# EAGLE board Bedroom_board (EAGLE 7.7.0)
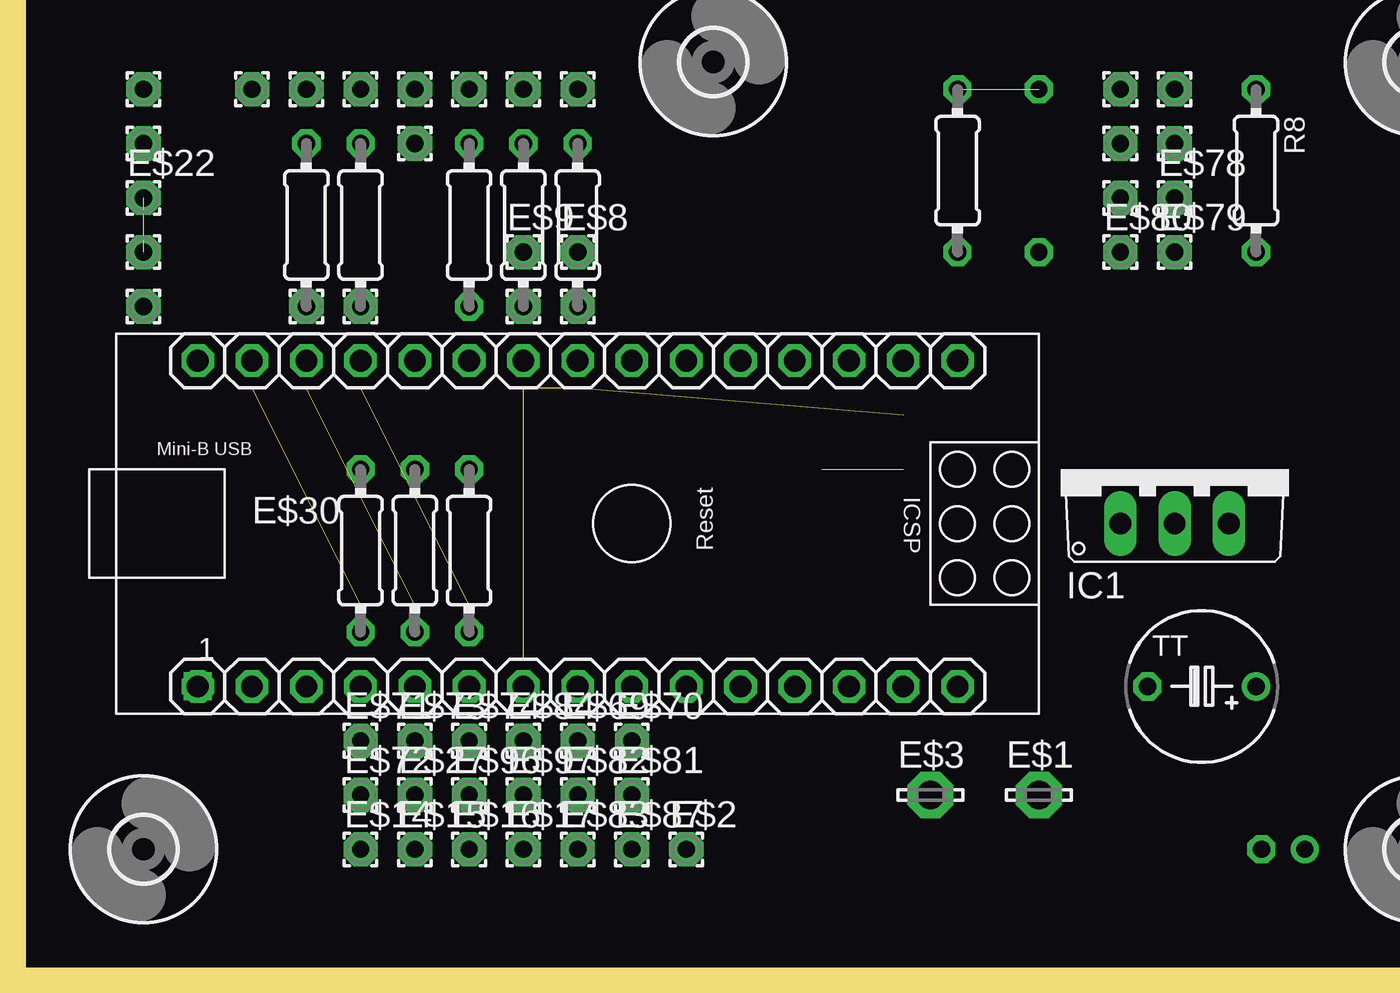
[diagram p0: board, top side]
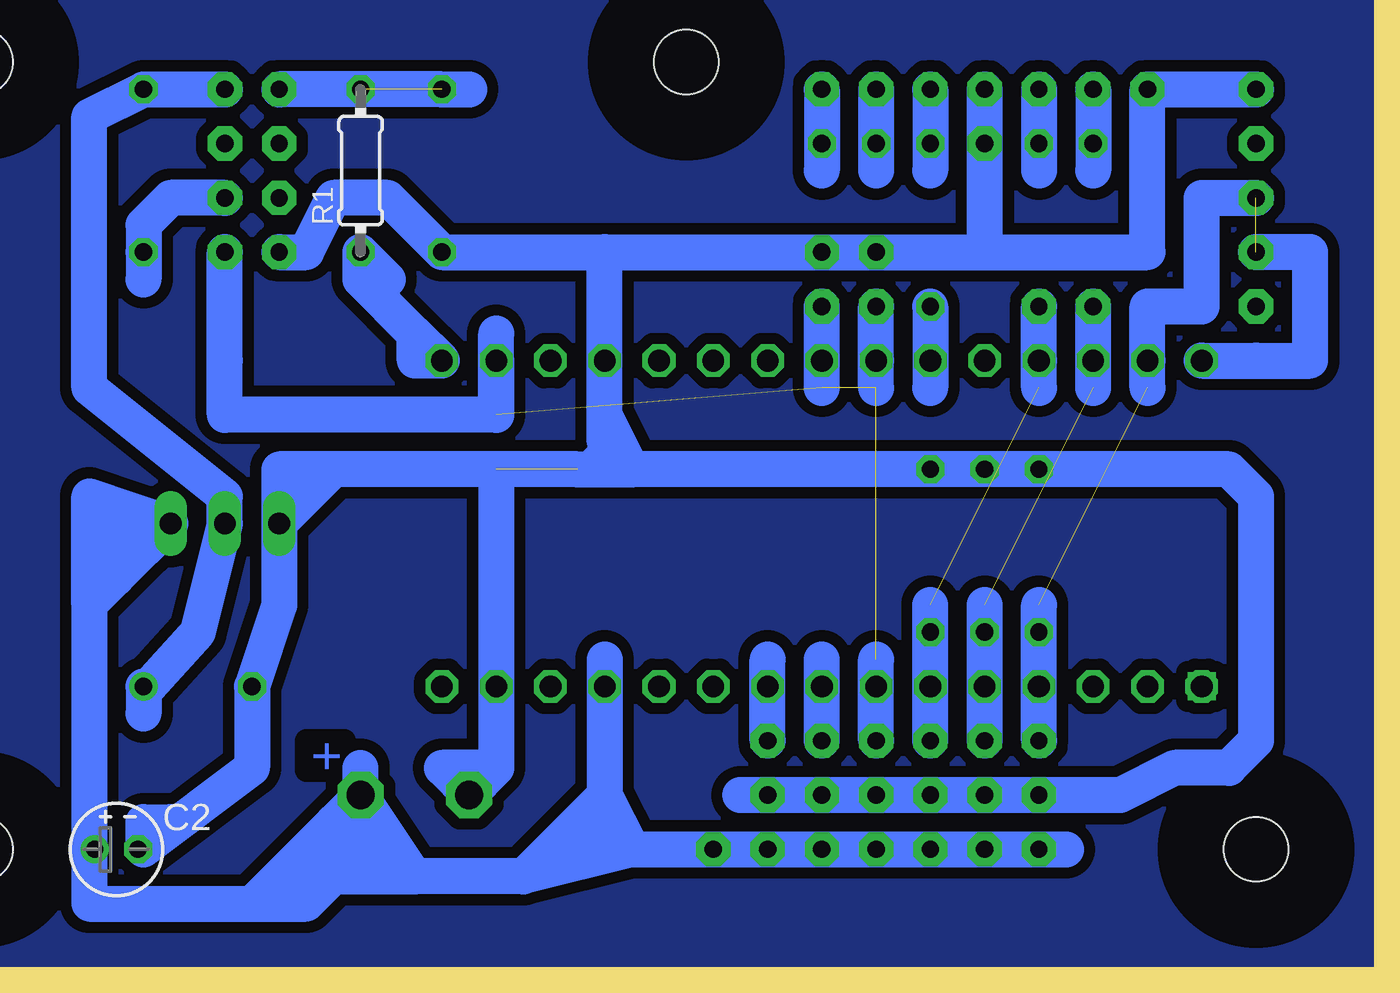
[diagram p1: board, bottom side, seen from below]

No outline drawn. Coordinates in mm, seen from the top.
Copper layers (1*16): Top 0.035mm / dielectric 1.5mm / Bottom 0.035mm
Design rules "ESP test": minimum track width 10mil, minimum drill 24mil, track to track 0.205mm, track to pad 0.205mm, pad to pad 0.205mm, via to via 0.205mm, smd to smd 8mil, copper to edge 40mil, drill to drill 8mil, minimum pad ring 10mil, minimum via ring 8mil, stop-mask expansion 4mil, vias tented up to drill 0mil, thermal gap 10mil
Net classes: 0 default: clearance 0.205 mm
Milling: 4 lines

## Footprints (pad centres in the part's own frame; a part is rotated, then mirrored left to right if it is on the bottom)
E2-4 = drill 0.813 pad 1.27: + -1.016,0 | drill 0.813 pad 1.27 octagon: - 1.016,0
LSP13 = drill 1.321 pad 2.159 octagon: MP 0,0
1,6/0,8 = drill 0.813 pad 1.6 octagon: 1 0,0
3,0 = hole 3: 0,0
ARDUINO_NANO = drill 0.8 square: 1 -20.32,-7.62 | drill 0.8: 2 -17.78,-7.62; 3 -15.24,-7.62; 4 -12.7,-7.62; 5 -10.16,-7.62; 6 -7.62,-7.62; 7 -5.08,-7.62; 8 -2.54,-7.62; 9 0,-7.62; 10 2.54,-7.62; 11 5.08,-7.62; 12 7.62,-7.62; 13 10.16,-7.62; 14 12.7,-7.62; 15 15.24,-7.62; 16 15.24,7.62; 17 12.7,7.62; 18 10.16,7.62; 19 7.62,7.62; 20 5.08,7.62; 21 2.54,7.62; 22 0,7.62; 23 -2.54,7.62; 24 -5.08,7.62; 25 -7.62,7.62; 26 -10.16,7.62; 27 -12.7,7.62; 28 -15.24,7.62; 29 -17.78,7.62; 30 -20.32,7.62
1X01 = drill 1.016 octagon: 1 0,0
TAP5-70 = drill 0.813: + -2.54,0 | drill 0.813 octagon: - 2.54,0
TO220V = drill 1.016 long: 1 -2.54,-2.54; 2 0,-2.54; 3 2.54,-2.54
0204/7 = drill 0.813 octagon: 1 -3.81,0; 2 3.81,0

## Placement (x,y rotation side)
C2  100uF  [E2-4]  57.15,5.08 0 bottom
E$1  [LSP13]  45.72,7.62 0 top
E$2  [1,6/0,8]  29.21,5.08 0 top
E$3  [LSP13]  40.64,7.62 0 top
E$4  [3,0]  30.48,41.91 0 top
E$5  [3,0]  63.5,41.91 0 top
E$6  [3,0]  63.5,5.08 0 top
E$7  [3,0]  3.81,5.08 0 top
E$8  [1,6/0,8]  24.13,33.02 0 top
E$9  [1,6/0,8]  21.59,33.02 0 top
E$10  [1,6/0,8]  3.81,35.56 0 top
E$11  [1,6/0,8]  3.81,38.1 0 top
E$12  [1,6/0,8]  3.81,40.64 0 top
E$14  [1,6/0,8]  13.97,5.08 0 top
E$15  [1,6/0,8]  16.51,5.08 0 top
E$16  [1,6/0,8]  19.05,5.08 0 top
E$17  [1,6/0,8]  21.59,5.08 0 top
E$18  [1,6/0,8]  11.43,40.64 0 top
E$19  [1,6/0,8]  8.89,40.64 0 top
E$20  [1,6/0,8]  13.97,40.64 0 top
E$21  [1,6/0,8]  3.81,30.48 0 top
E$22  [1,6/0,8]  3.81,35.56 0 top
E$23  [1,6/0,8]  11.43,30.48 0 top
E$24  [1,6/0,8]  13.97,30.48 0 top
E$25  [1,6/0,8]  19.05,40.64 0 top
E$26  [1,6/0,8]  16.51,40.64 0 top
E$27  [1,6/0,8]  16.51,7.62 0 top
E$28  [1,6/0,8]  16.51,38.1 0 top
E$30  [ARDUINO_NANO]  26.67,20.32 0 top
E$31  [1,6/0,8]  21.59,30.48 0 top
E$32  [1,6/0,8]  24.13,30.48 0 top
E$33  [1X01]  6.35,12.7 0 top
E$34  [1X01]  8.89,12.7 0 top
E$35  [1X01]  11.43,12.7 0 top
E$36  [1X01]  13.97,12.7 0 top
E$37  [1X01]  16.51,12.7 0 top
E$38  [1X01]  19.05,12.7 0 top
E$39  [1X01]  21.59,12.7 0 top
E$40  [1X01]  24.13,12.7 0 top
E$41  [1X01]  26.67,12.7 0 top
E$42  [1X01]  29.21,12.7 0 top
E$43  [1X01]  31.75,12.7 0 top
E$44  [1X01]  34.29,12.7 0 top
E$45  [1X01]  36.83,12.7 0 top
E$46  [1X01]  39.37,12.7 0 top
E$47  [1X01]  41.91,12.7 0 top
E$48  [1X01]  41.91,27.94 0 top
E$49  [1X01]  39.37,27.94 0 top
E$50  [1X01]  36.83,27.94 0 top
E$51  [1X01]  34.29,27.94 0 top
E$52  [1X01]  31.75,27.94 0 top
E$53  [1X01]  29.21,27.94 0 top
E$54  [1X01]  26.67,27.94 0 top
E$55  [1X01]  24.13,27.94 0 top
E$56  [1X01]  21.59,27.94 0 top
E$57  [1X01]  19.05,27.94 0 top
E$58  [1X01]  16.51,27.94 0 top
E$59  [1X01]  13.97,27.94 0 top
E$60  [1X01]  11.43,27.94 0 top
E$67  [1X01]  6.35,27.94 0 top
E$68  [1X01]  8.89,27.94 0 top
E$69  [1,6/0,8]  24.13,10.16 0 top
E$70  [1,6/0,8]  26.67,10.16 0 top
E$71  [1,6/0,8]  13.97,10.16 0 top
E$72  [1,6/0,8]  13.97,7.62 0 top
E$73  [1,6/0,8]  16.51,10.16 0 top
E$74  [1,6/0,8]  19.05,10.16 0 top
E$75  [1,6/0,8]  49.53,40.64 0 top
E$76  [1,6/0,8]  52.07,40.64 0 top
E$77  [1,6/0,8]  52.07,38.1 0 top
E$78  [1,6/0,8]  52.07,35.56 0 top
E$79  [1,6/0,8]  52.07,33.02 0 top
E$80  [1,6/0,8]  49.53,33.02 0 top
E$81  [1,6/0,8]  26.67,7.62 0 top
E$82  [1,6/0,8]  24.13,7.62 0 top
E$83  [1,6/0,8]  24.13,5.08 0 top
E$84  [1,6/0,8]  21.59,10.16 0 top
E$85  [1,6/0,8]  49.53,35.56 0 top
E$86  [1,6/0,8]  49.53,38.1 0 top
E$87  [1,6/0,8]  26.67,5.08 0 top
E$90  1000uF  [TAP5-70]  53.34,12.7 180 top
E$96  [1,6/0,8]  19.05,7.62 0 top
E$97  [1,6/0,8]  21.59,7.62 0 top
E$103  [1,6/0,8]  3.81,33.02 0 top
E$108  [1,6/0,8]  24.13,40.64 0 top
E$109  [1,6/0,8]  21.59,40.64 0 top
IC1  LM1117T(V)-ADJ  [TO220V]  52.07,22.86 0 top
R1  1K  [0204/7]  45.72,36.83 90 bottom
R2  2K  [0204/7]  41.91,36.83 270 top
R3  100  [0204/7]  11.43,34.29 270 top
R4  10k  [0204/7]  13.97,19.05 270 top
R5  10k  [0204/7]  16.51,19.05 270 top
R6  10k  [0204/7]  19.05,19.05 270 top
R7  220  [0204/7]  13.97,34.29 270 top
R8  10K  [0204/7]  55.88,36.83 270 top
R9  200  [0204/7]  21.59,34.29 270 top
R10  200  [0204/7]  24.13,34.29 270 top
R11  330  [0204/7]  19.05,34.29 270 top

## Library data of the parts
C2 E$90 R1-R11 = resistor
E$1 E$3 = solpad
E$2 E$8-E$12 E$14-E$28 E$31 E$32 E$69-E$87 E$96 E$97 E$103 E$108 E$109 = wirepad
E$4-E$7 = holes
E$30 = ArduinoNanoV30
E$33-E$60 E$67 E$68 = pinhead
IC1 = lm1117_11; MF: Texas Instruments; MPN: LM1777T-ADJ; OC_FARNELL: 9485805; OC_NEWARK: 13B5345

## Nets
GND: E$46.1 IC1.1 R2.2
N$3: IC1.2 R8.1
N$6: R1.1
N$7: R1.2 R2.1
N$11: R8.2
N$24: E$22.1 E$103.1
S$2: E$109.1
S$5: E$90.+
S$6: E$18.1
S$7: E$20.1
S$12: E$108.1
S$16: E$69.1
S$17: E$68.1
S$18: E$67.1
S$19: E$70.1
S$20: R11.2
VCC: IC1.3

## Tracks (layer width: path | path; a pad name or v marks a point on that pad's centre or on a via)
GND  (1 unrouted)
  Bottom 0.406: 11.43,7.62 21.59,7.62
  Bottom 0.813: 34.29,22.86 33.02,22.86 34.29,24.13 | 34.29,22.86 35.56,22.86 34.29,24.13 | 34.29,22.86 34.29,24.13
  Bottom 1.676: 33.02,22.86 5.08,22.86 3.81,21.59 3.81,10.16 5.08,8.89 7.62,8.89 10.16,7.62 21.59,7.62 27.94,7.62 | 33.02,22.86 35.56,22.86 46.99,22.86 | 46.99,22.86 IC1.1 | 34.29,33.02 16.51,33.02 | 16.51,33.02 8.89,33.02 8.89,40.64 3.81,40.64 | 34.29,33.02 R2.2 44.45,35.56 46.99,35.56 48.26,33.02 49.53,33.02 | 34.29,24.13 34.29,25.4 | 34.29,25.4 34.29,33.02 | IC1.1 49.53,16.51 50.8,12.7 50.8,8.89 55.88,5.08 55.88,6.35 54.61,6.35 | 33.02,22.86 34.29,25.4 | 46.99,22.86 49.53,22.86 IC1.1 | 16.51,33.02 16.51,40.64 | 39.37,22.86 E$46.1 39.37,8.89 | 39.37,8.89 40.64,7.62 41.91,8.89 39.37,8.89
N$3
  Bottom 1.676: 52.07,40.64 R8.1 58.42,39.37 58.42,26.67 52.07,21.59 IC1.2 53.34,15.24 55.63,12.7
N$4
  Bottom 1.676: 43.18,29.21 41.91,27.94 43.18,27.94 43.18,29.21 | 43.18,29.21 45.72,31.75
N$5
  Bottom 1.676: 39.37,27.94 39.37,25.4 52.07,25.4 52.07,27.94
N$6
  Bottom 1.676: 45.72,31.75 R1.1 44.45,31.75
N$7  (1 unrouted)
  Bottom 1.676: 49.53,40.64 R2.1 40.64,40.64
N$11
  Bottom 1.676: 52.07,35.56 54.61,35.56 55.88,34.29 R8.2 55.88,31.75
N$14  (1 unrouted)
  Bottom 1.676: 19.05,10.16 19.05,16.51 | 13.97,26.67 13.97,30.48
N$15  (3 unrouted)
  Bottom 1.676: 21.59,10.16 21.59,13.97 | 21.59,26.67 21.59,30.48 | 24.13,26.67 24.13,30.48 | 39.37,25.4 39.37,29.21
N$24  (2 unrouted)
  Bottom 1.676: 13.97,10.16 13.97,16.51 | 8.89,26.67 8.89,30.48 6.35,30.48 6.35,35.56 E$22.1 | 6.35,27.94 1.27,27.94 1.27,33.02 E$103.1
N$25  (1 unrouted)
  Bottom 1.676: 16.51,10.16 16.51,16.51 | 11.43,26.67 11.43,30.48
POLY
  pour Bottom (isolate 0.533, rank 6): -2.54,-1.27 69.85,-1.27 69.85,48.26 -2.54,48.26
S$1
  Bottom 1.676: 24.13,27.94 24.13,30.48
S$2
  Bottom 1.676: E$109.1 21.59,36.83
S$3
  Bottom 1.676: 34.29,6.35 35.56,5.08
S$4
  Bottom 1.676: 52.07,27.94 52.07,33.02
S$5
  Bottom 1.676: E$90.+ 55.88,11.43
S$6
  Bottom 1.676: E$18.1 11.43,36.83
S$7
  Bottom 1.676: E$20.1 13.97,36.83
S$11
  Bottom 1.676: 21.59,27.94 21.59,30.48
S$12
  Bottom 1.676: E$108.1 24.13,36.83
S$13
  Bottom 1.676: 13.97,27.94 13.97,30.48
S$15
  Bottom 1.676: 11.43,27.94 11.43,30.48
S$16
  Bottom 1.676: E$69.1 24.13,13.97
S$17
  Bottom 1.676: E$68.1 8.89,30.48
S$18
  Bottom 1.676: E$67.1 3.81,27.94
S$19
  Bottom 1.676: E$70.1 26.67,13.97
S$20
  Bottom 1.676: R11.2 19.05,26.67
S$21
  Bottom 1.676: 19.05,40.64 19.05,36.83
VCC
  Bottom 1.676: 57.15,17.78 IC1.3 58.42,21.59 58.42,16.51 | 57.15,17.78 58.42,16.51 | 58.42,16.51 58.42,2.54 50.8,2.54 | 50.8,2.54 49.53,2.54 | 34.29,7.62 38.1,3.81 | 34.29,13.97 34.29,7.62 | 34.29,7.62 33.02,5.08 | 33.02,5.08 12.7,5.08 | 43.18,3.81 45.72,7.62 | 49.53,2.54 46.99,6.35 | 46.99,6.35 45.72,6.35 45.72,7.62 | 33.02,5.08 38.1,3.81 | 38.1,3.81 43.18,3.81 | 43.18,3.81 46.99,6.35 | 57.15,20.32 57.15,17.78 | 57.15,17.78 55.88,20.32 | 45.72,7.62 46.99,6.35 | 46.99,6.35 50.8,2.54 | 45.72,5.08 46.99,5.08 49.53,2.54 | 49.53,2.54 48.26,2.54 46.99,3.81 43.18,3.81 | 45.72,7.62 45.72,8.89

## Text on the board
Bottom: +
Document: Buzzer | FTDI